# Altium PCB Pranus_LEDMatrix_B1_2015-06-04.PcbDoc
Units mil, origin at the board's own origin, x right, y up, seen from the top; angles counter-clockwise.
Board outline 3346.44 x 2837.73 mil, 2 copper layers (Top Layer, Bottom Layer); 192 components, 79 nets, 436 pads, 250 vias.
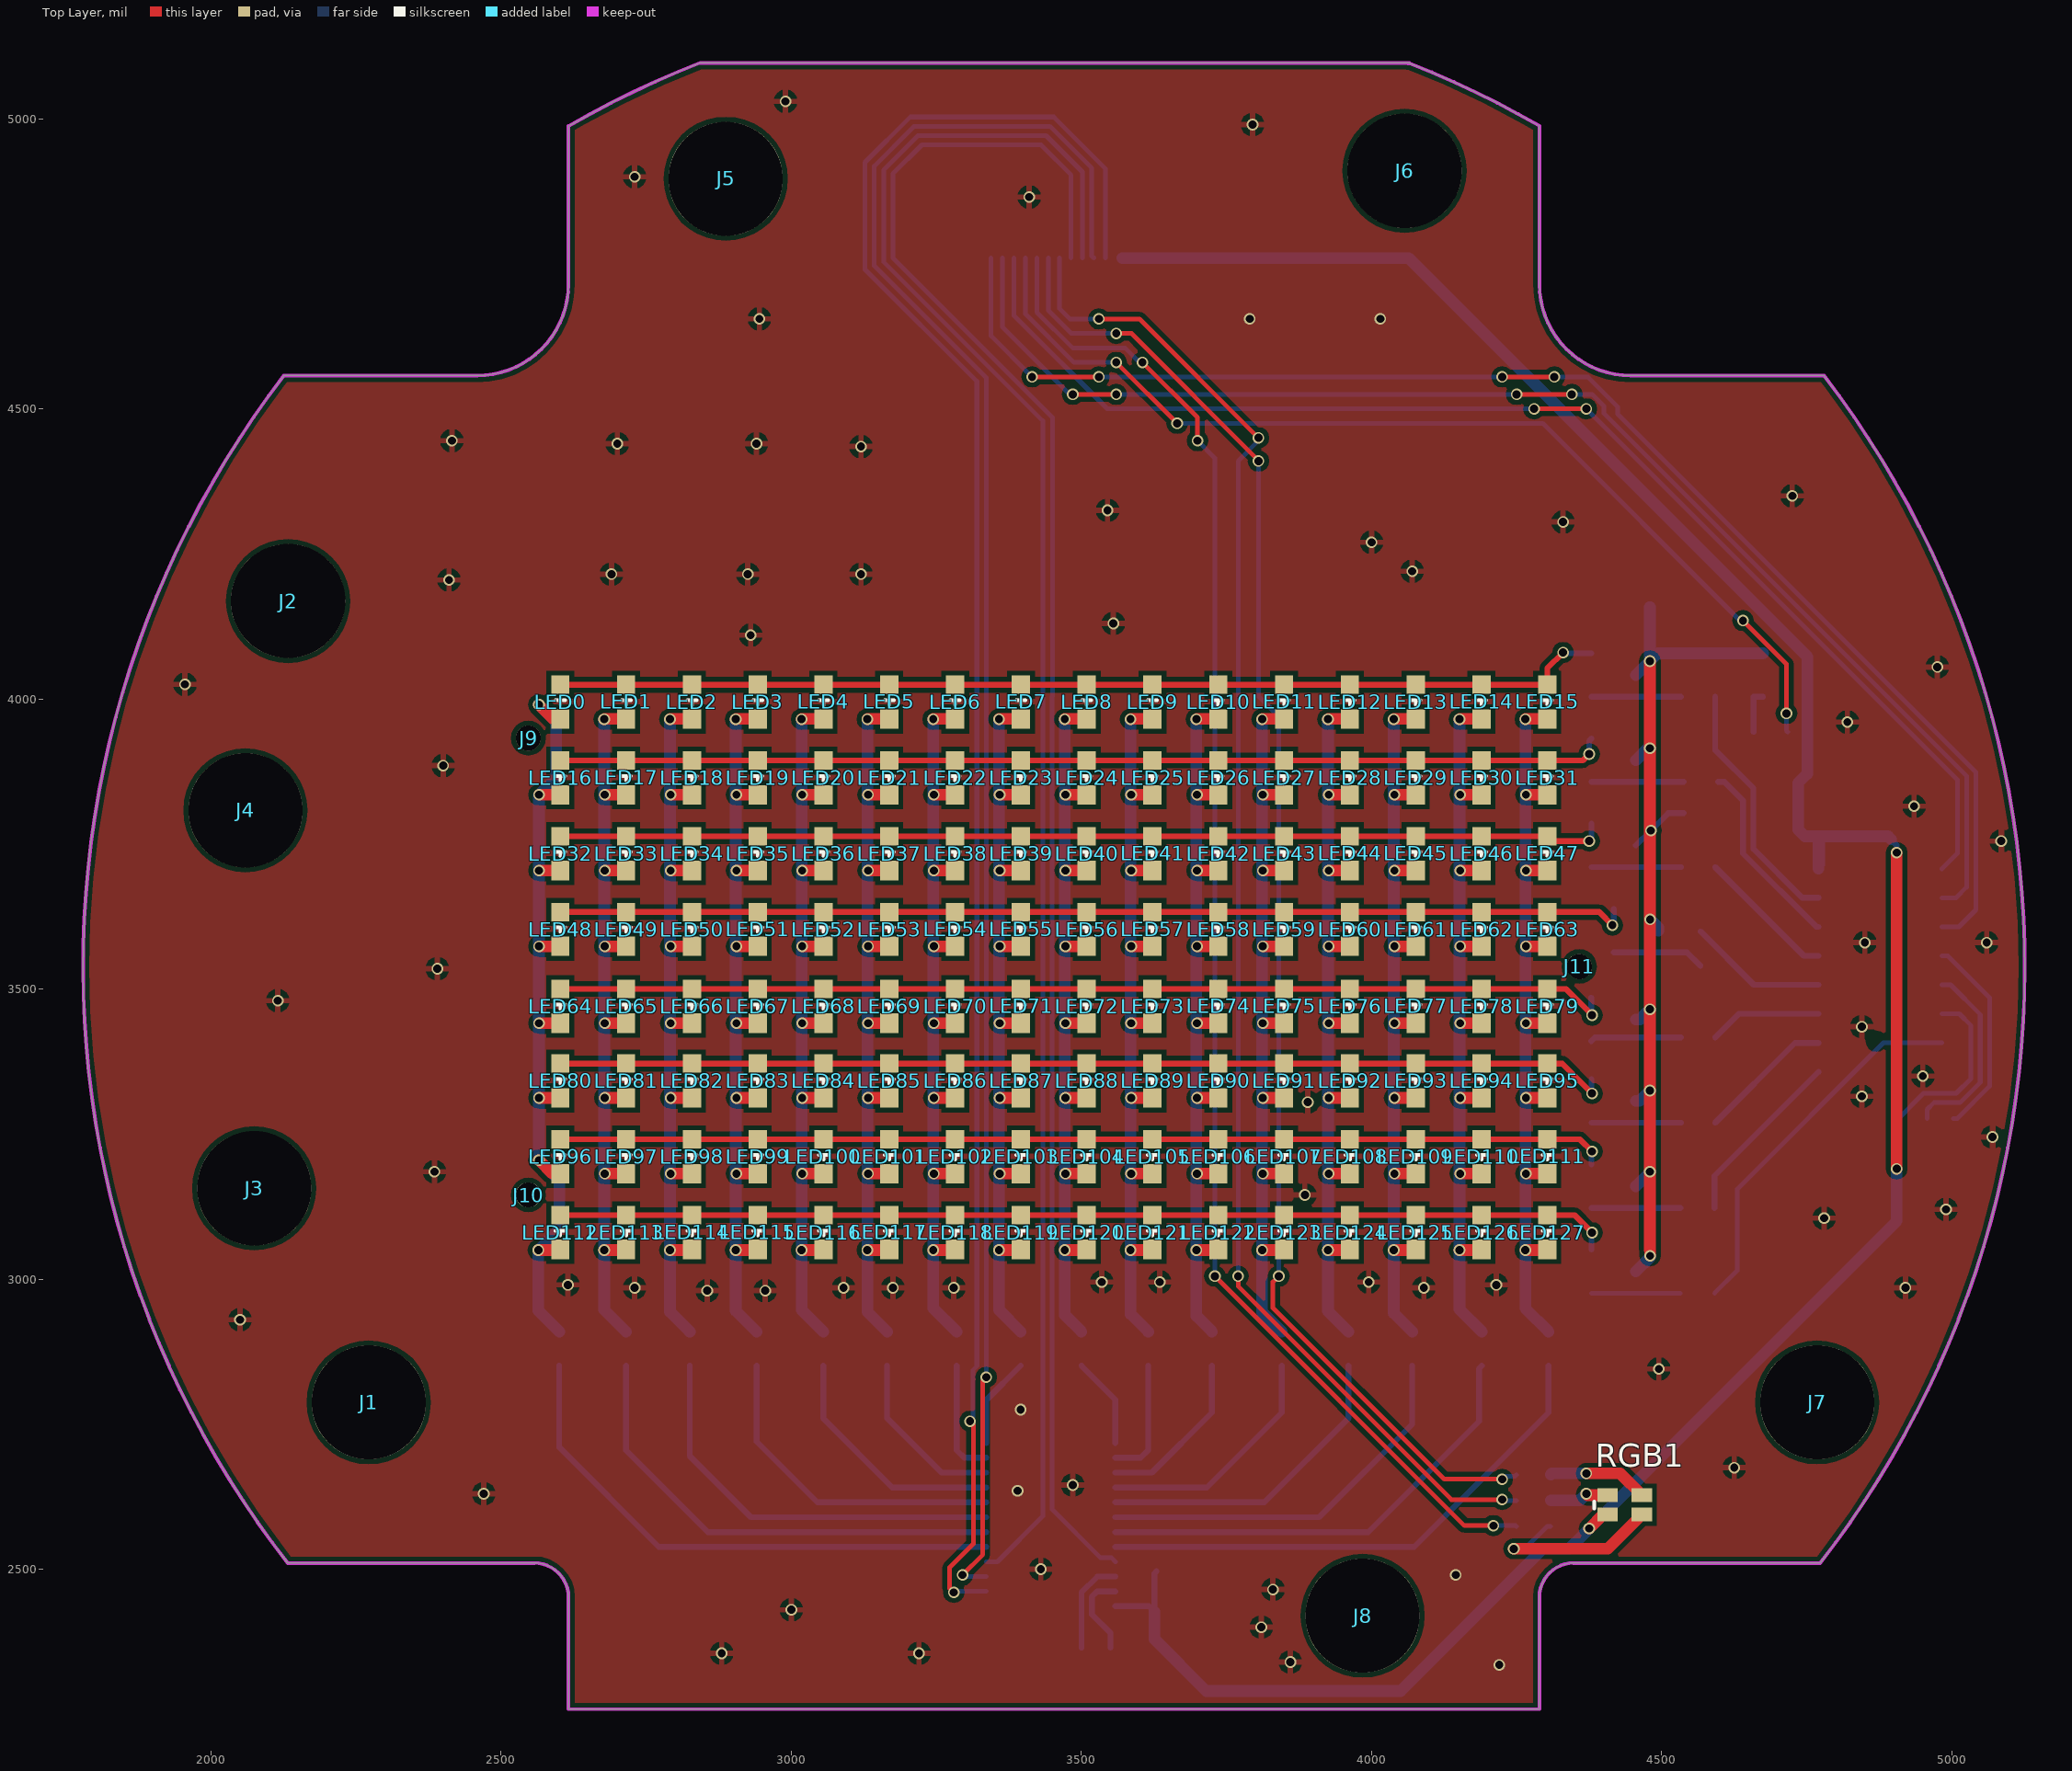
[diagram p0: Top Layer view]
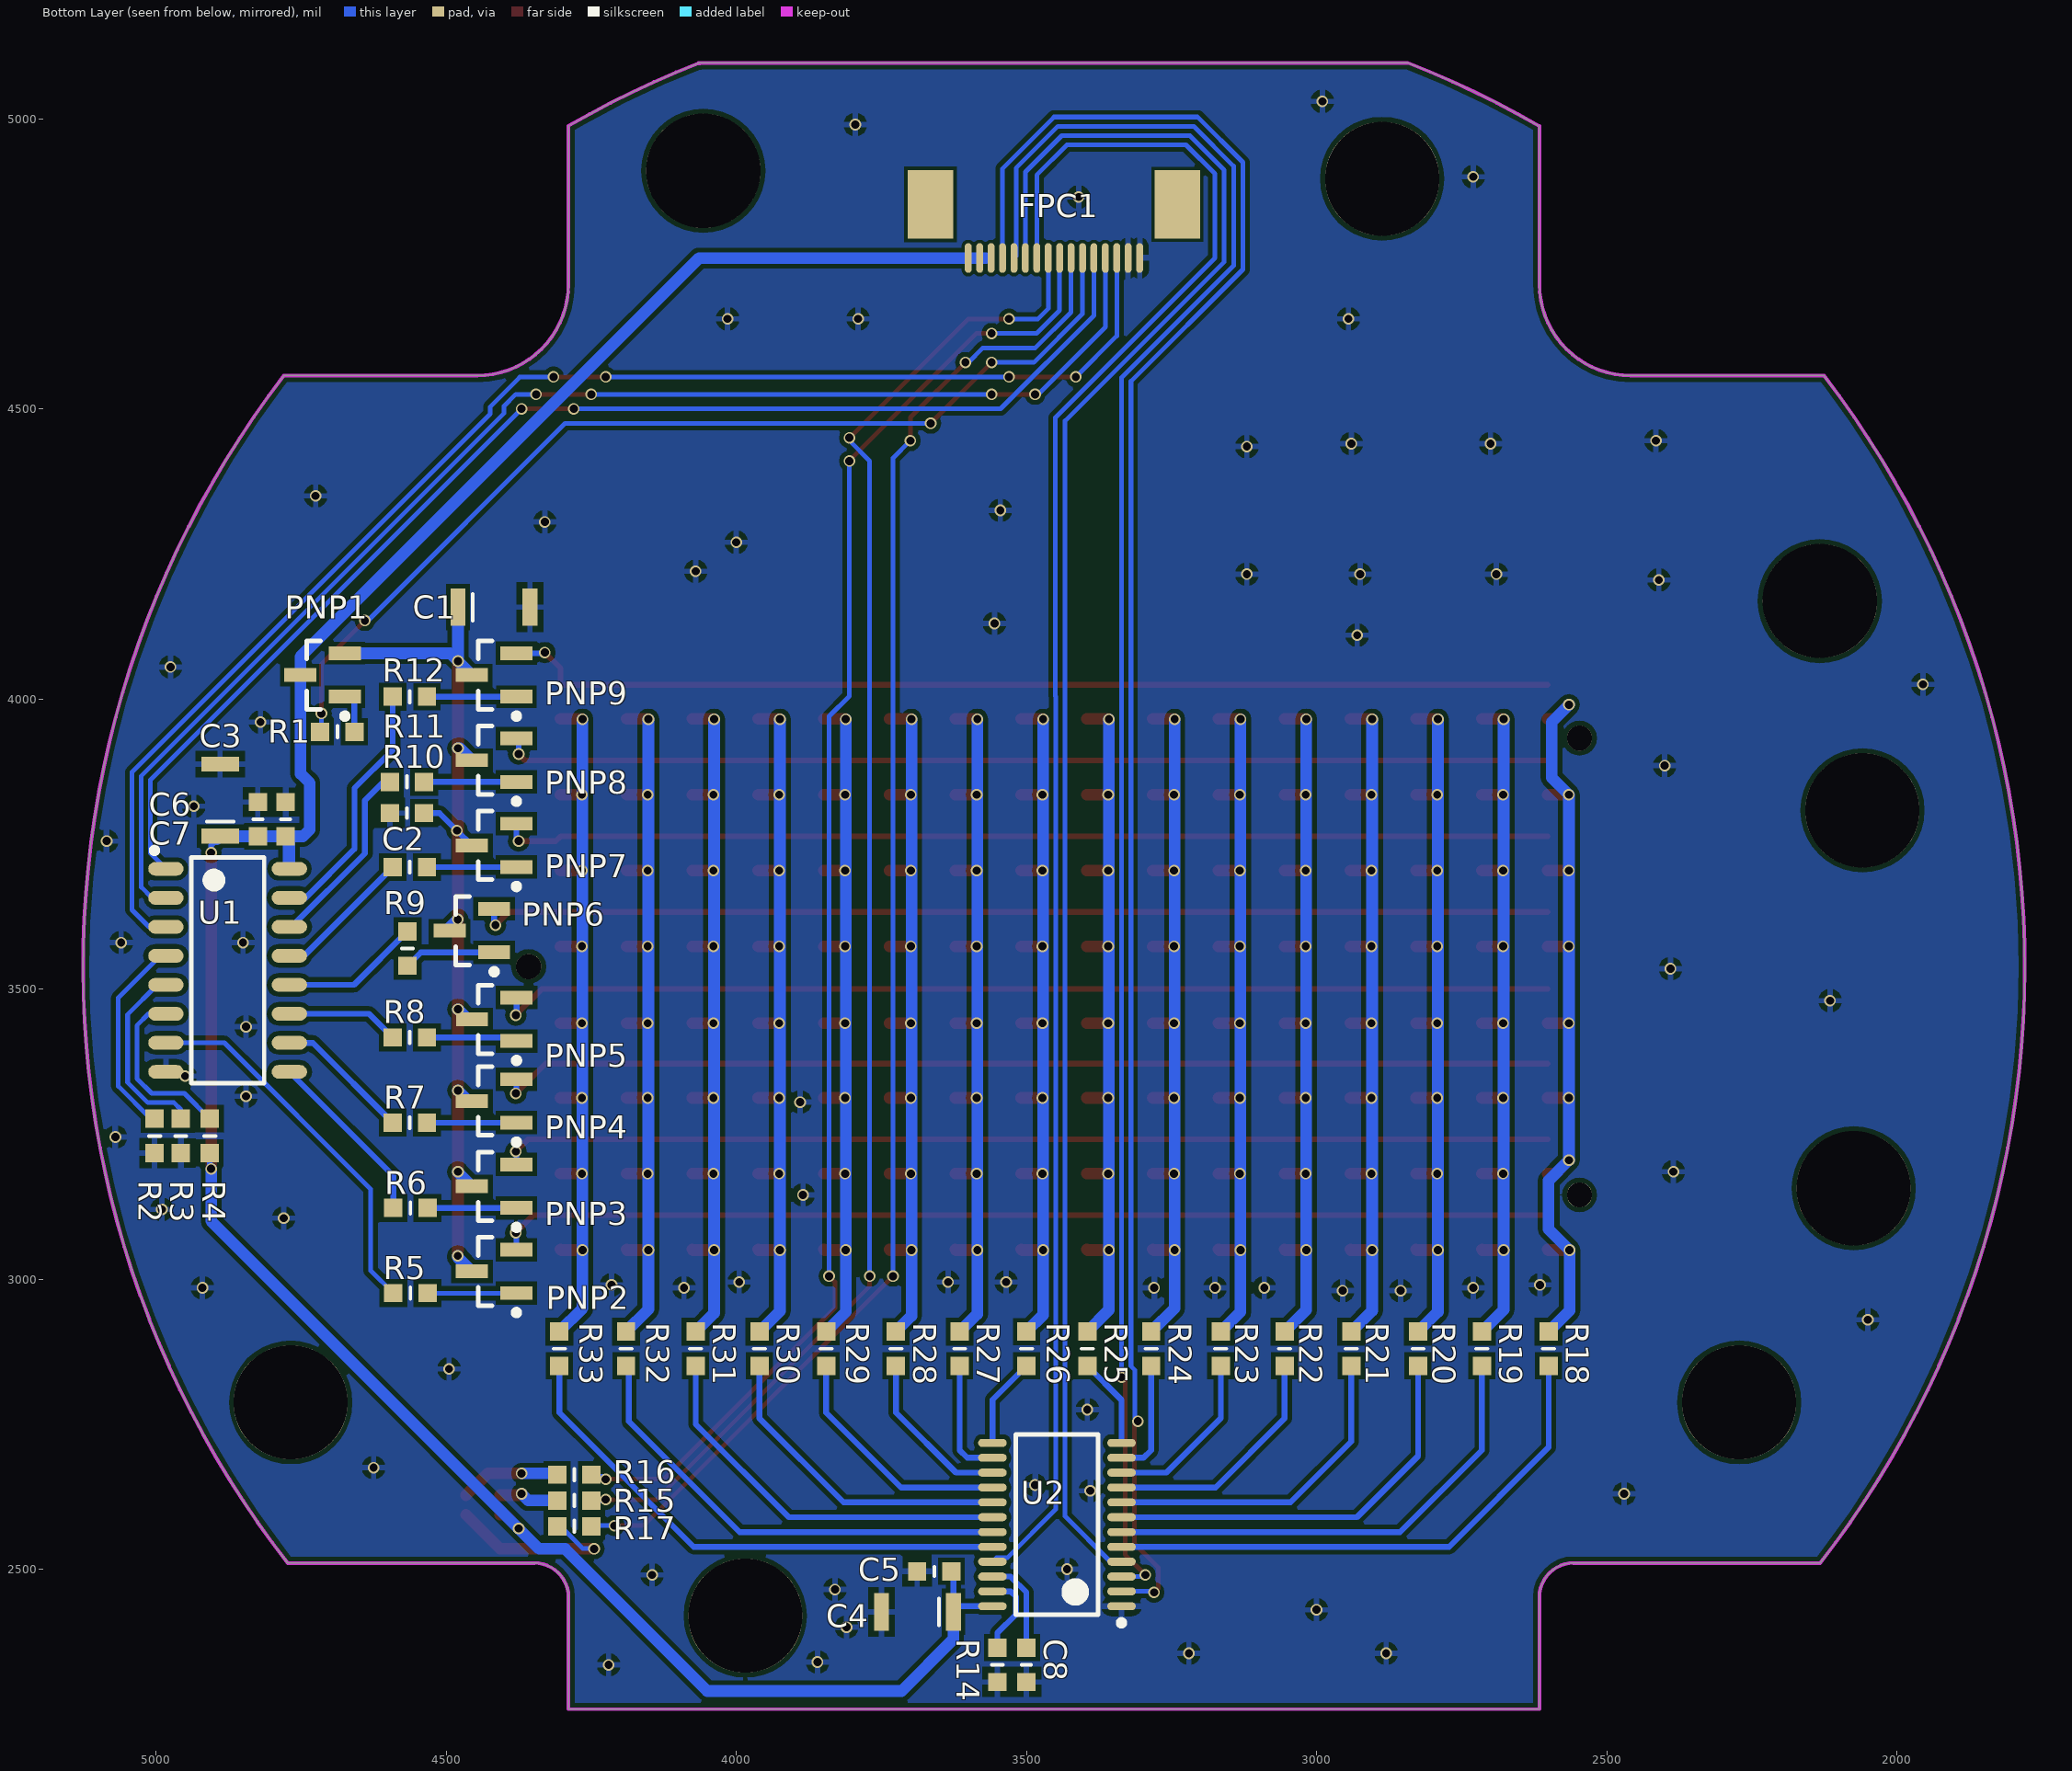
[diagram p1: Bottom Layer view, seen from below]

## Layer stack, top to bottom
Top Layer: signal copper 1.4
Dielectric: dielectric 12.6, FR-4, Dk 4.8
Bottom Layer: signal copper 1.4

## Board outline
2615.95,2258.7 2615.95,2451.61 ccw(c2556.9,2451.61) 2556.9,2510.67 2132.03,2510.67 cw(c3452.57,3538.23) 2125.51,4557.35 2458.47,4557.35 ccw(c2458.47,4714.83) 2615.95,4714.83 2615.95,4987.29 cw(c3452.57,3538.23) 2842.9,5096.43 2842.9,5096.24 4065.32,5096.24 4065.32,5095.64 cw(c3452.48,3538.68) 4289.36,4987.59 4289.18,4987.29 4289.18,4714.83 ccw(c4446.66,4714.83) 4446.66,4557.35 4779.63,4557.35 cw(c3452.57,3538.23) 4773.1,2510.67 4348.24,2510.67 ccw(c4348.24,2451.61) 4289.18,2451.61 4289.18,2258.7

## Design rules (kind name [scope] priority, off if disabled: settings)
Clearance "6mil Special" [(HasFootprint('FPC 0.5mm 4P') OR HasFootprint('FPC 0.5mm 16P'))] p1: gap=6
Clearance "8mil all" [All] p2: gap=8
ComponentClearance [All] p1: gap=0 collisioncheckmode=3 verticalgap=10 showdistances=FALSE
Height [All] p1: minheight=0 maxheight=2000 prefheight=500
HoleSize [All] p1: absolutevalues=TRUE maxlimit=1000 minlimit=1 maxpercent=80.000 minpercent=20.000
HoleToHoleClearance [All] p1: gap=8 allowstackedmicrovias=TRUE
MinimumSolderMaskSliver [All] p1: minsoldermaskwidth=0
PolygonConnect [All] p1: connectstyle=Relief reliefconductorwidth=10 reliefentries=4 polygonreliefangle="90 Angle" airgapwidth=10
RoutingCorners [All] p1: cornerstyle=45-Degree minsetback=10 maxsetback=100
RoutingVias [All] p1: holewidth=14 width=20 viastyle="Through Hole" minholewidth=14 minwidth=20 maxholewidth=100 maxwidth=200
SilkToSilkClearance [All] p1: silktosilkclearance=8
SilkToSolderMaskClearance [IsPad] p1: minsilkscreentomaskgap=0 clearancetoexposedcopper=TRUE
SolderMaskExpansion [All] p1: expansion=4
Width 20mil_Power [(InNet('EP_SUPPLY&VBAT') OR InNet('PSUPPLY') OR InNet('P_3.3V') OR InNet('PSUPPLYBAT') OR InNet('P_3.3V') OR InNet('P_5V'))] p1: maxlimit=1000 minlimit=8 preferedwidth=20
Width 8mil_Basic [All] p2: maxlimit=20 minlimit=8 preferedwidth=10
20 further rules are at their usual default settings.

## Components (designator, comment, footprint, x,y, rotation, side; value= is the part's Value field where it differs from the comment)
C1 "10uf" PolarC1206 4417.6,4158.21 r180 bottom
C2 "1uf" C0603 4567.6,3803.21 r0 bottom
C3 "10uf" PolarC1206 4889.57,3825.63 r90 bottom
C4 "10uf" PolarC1206 3687.72,2426.42 r0 bottom
C5 "1uf" C0603 3658.8,2496.21 r0 bottom
C6 "1uf" C0603 4824.6,3792.68 r90 bottom
C7 "1uf" C0603 4776.6,3792.68 r90 bottom
C8 "1uf" C0603 3500,2335 r270 bottom
FPC1 "FPC 0.5mm 16P" "FPC 0.5MM 16P" 3452.56,4806.22 r0 bottom
J1 "CON1" 5MM 2271.73,2787.5 r0 top locked
J2 "CON1" 5MM 2132.6,4168.68 r0 top locked
J3 "CON1" 5MM 2074.25,3156.4 r0 top locked
J4 "CON1" 5MM 2059.21,3807.98 r0 top locked
J5 "CON1" 5MM 2886.85,4896.56 r0 top locked
J6 "CON1" 5MM 4056.85,4910.34 r0 top locked
J7 "CON1" 5MM 4767.95,2787.5 r0 top locked
J8 "CON1" 5MM 3984.41,2419.79 r0 top locked
J9 "CON1" 1.1MM 2546.8,3932.42 r0 top
J10 "CON1" 1.1MM 2546.8,3145.02 r90 top
J11 "CON1" 1.1MM 4357.82,3538.72 r0 top
LED0 "White" LED0603 2601.85,3994.92 r270 top locked
LED1 "White" LED0603 2715.25,3994.92 r270 top locked
LED2 "White" LED0603 2828.64,3994.92 r270 top locked
LED3 "White" LED0603 2942.04,3994.92 r270 top locked
LED4 "White" LED0603 3055.44,3994.92 r270 top locked
LED5 "White" LED0603 3168.83,3994.92 r270 top locked
LED6 "White" LED0603 3282.23,3994.92 r270 top locked
LED7 "White" LED0603 3395.62,3994.92 r270 top locked
LED8 "White" LED0603 3509.02,3994.92 r270 top locked
LED9 "White" LED0603 3622.42,3994.92 r270 top locked
LED10 "White" LED0603 3735.81,3994.92 r270 top locked
LED11 "White" LED0603 3849.21,3994.92 r270 top locked
LED12 "White" LED0603 3962.61,3994.92 r270 top locked
LED13 "White" LED0603 4076,3994.92 r270 top locked
LED14 "White" LED0603 4189.4,3994.92 r270 top locked
LED15 "White" LED0603 4302.79,3994.92 r270 top locked
LED16 "White" LED0603 2601.85,3864.31 r270 top locked
LED17 "White" LED0603 2715.25,3864.31 r270 top locked
LED18 "White" LED0603 2828.64,3864.31 r270 top locked
LED19 "White" LED0603 2942.04,3864.31 r270 top locked
LED20 "White" LED0603 3055.44,3864.31 r270 top locked
LED21 "White" LED0603 3168.83,3864.31 r270 top locked
LED22 "White" LED0603 3282.23,3864.31 r270 top locked
LED23 "White" LED0603 3395.62,3864.31 r270 top locked
LED24 "White" LED0603 3509.02,3864.31 r270 top locked
LED25 "White" LED0603 3622.42,3864.31 r270 top locked
LED26 "White" LED0603 3735.81,3864.31 r270 top locked
LED27 "White" LED0603 3849.21,3864.31 r270 top locked
LED28 "White" LED0603 3962.61,3864.31 r270 top locked
LED29 "White" LED0603 4076,3864.31 r270 top locked
LED30 "White" LED0603 4189.4,3864.31 r270 top locked
LED31 "White" LED0603 4302.79,3864.31 r270 top locked
LED32 "White" LED0603 2601.85,3733.71 r270 top locked
LED33 "White" LED0603 2715.25,3733.71 r270 top locked
LED34 "White" LED0603 2828.64,3733.71 r270 top locked
LED35 "White" LED0603 2942.04,3733.71 r270 top locked
LED36 "White" LED0603 3055.44,3733.71 r270 top locked
LED37 "White" LED0603 3168.83,3733.71 r270 top locked
LED38 "White" LED0603 3282.23,3733.71 r270 top locked
LED39 "White" LED0603 3395.62,3733.71 r270 top locked
LED40 "White" LED0603 3509.02,3733.71 r270 top locked
LED41 "White" LED0603 3622.42,3733.71 r270 top locked
LED42 "White" LED0603 3735.81,3733.71 r270 top locked
LED43 "White" LED0603 3849.21,3733.71 r270 top locked
LED44 "White" LED0603 3962.61,3733.71 r270 top locked
LED45 "White" LED0603 4076,3733.71 r270 top locked
LED46 "White" LED0603 4189.4,3733.71 r270 top locked
LED47 "White" LED0603 4302.79,3733.71 r270 top locked
LED48 "White" LED0603 2601.85,3603.1 r270 top locked
LED49 "White" LED0603 2715.25,3603.1 r270 top locked
LED50 "White" LED0603 2828.64,3603.1 r270 top locked
LED51 "White" LED0603 2942.04,3603.1 r270 top locked
LED52 "White" LED0603 3055.44,3603.1 r270 top locked
LED53 "White" LED0603 3168.83,3603.1 r270 top locked
LED54 "White" LED0603 3282.23,3603.1 r270 top locked
LED55 "White" LED0603 3395.62,3603.1 r270 top locked
LED56 "White" LED0603 3509.02,3603.1 r270 top locked
LED57 "White" LED0603 3622.42,3603.1 r270 top locked
LED58 "White" LED0603 3735.81,3603.1 r270 top locked
LED59 "White" LED0603 3849.21,3603.1 r270 top locked
LED60 "White" LED0603 3962.61,3603.1 r270 top locked
LED61 "White" LED0603 4076,3603.1 r270 top locked
LED62 "White" LED0603 4189.4,3603.1 r270 top locked
LED63 "White" LED0603 4302.79,3603.1 r270 top locked
LED64 "White" LED0603 2601.85,3470.51 r270 top locked
LED65 "White" LED0603 2715.25,3470.51 r270 top locked
LED66 "White" LED0603 2828.64,3470.51 r270 top locked
LED67 "White" LED0603 2942.04,3470.51 r270 top locked
LED68 "White" LED0603 3055.44,3470.51 r270 top locked
LED69 "White" LED0603 3168.83,3470.51 r270 top locked
LED70 "White" LED0603 3282.23,3470.51 r270 top locked
LED71 "White" LED0603 3395.62,3470.51 r270 top locked
LED72 "White" LED0603 3509.02,3470.51 r270 top locked
LED73 "White" LED0603 3622.42,3470.51 r270 top locked
LED74 "White" LED0603 3735.81,3470.51 r270 top locked
LED75 "White" LED0603 3849.21,3470.51 r270 top locked
LED76 "White" LED0603 3962.61,3470.51 r270 top locked
LED77 "White" LED0603 4076,3470.51 r270 top locked
LED78 "White" LED0603 4189.4,3470.51 r270 top locked
LED79 "White" LED0603 4302.79,3470.51 r270 top locked
LED80 "White" LED0603 2601.85,3341.88 r270 top locked
LED81 "White" LED0603 2715.25,3341.88 r270 top locked
LED82 "White" LED0603 2828.64,3341.88 r270 top locked
LED83 "White" LED0603 2942.04,3341.88 r270 top locked
LED84 "White" LED0603 3055.44,3341.88 r270 top locked
LED85 "White" LED0603 3168.83,3341.88 r270 top locked
LED86 "White" LED0603 3282.23,3341.88 r270 top locked
LED87 "White" LED0603 3395.62,3341.88 r270 top locked
LED88 "White" LED0603 3509.02,3341.88 r270 top locked
LED89 "White" LED0603 3622.42,3341.88 r270 top locked
LED90 "White" LED0603 3735.81,3341.88 r270 top locked
LED91 "White" LED0603 3849.21,3341.88 r270 top locked
LED92 "White" LED0603 3962.61,3341.88 r270 top locked
LED93 "White" LED0603 4076,3341.88 r270 top locked
LED94 "White" LED0603 4189.4,3341.88 r270 top locked
LED95 "White" LED0603 4302.79,3341.88 r270 top locked
LED96 "White" LED0603 2601.85,3211.28 r270 top locked
LED97 "White" LED0603 2715.25,3211.28 r270 top locked
LED98 "White" LED0603 2828.64,3211.28 r270 top locked
LED99 "White" LED0603 2942.04,3211.28 r270 top locked
LED100 "White" LED0603 3055.44,3211.28 r270 top locked
LED101 "White" LED0603 3168.83,3211.28 r270 top locked
LED102 "White" LED0603 3282.23,3211.28 r270 top locked
LED103 "White" LED0603 3395.62,3211.28 r270 top locked
LED104 "White" LED0603 3509.02,3211.28 r270 top locked
LED105 "White" LED0603 3622.42,3211.28 r270 top locked
LED106 "White" LED0603 3735.81,3211.28 r270 top locked
LED107 "White" LED0603 3849.21,3211.28 r270 top locked
LED108 "White" LED0603 3962.61,3211.28 r270 top locked
LED109 "White" LED0603 4076,3211.28 r270 top locked
LED110 "White" LED0603 4189.4,3211.28 r270 top locked
LED111 "White" LED0603 4302.79,3211.28 r270 top locked
LED112 "White" LED0603 2601.85,3080.67 r270 top locked
LED113 "White" LED0603 2715.25,3080.67 r270 top locked
LED114 "White" LED0603 2828.64,3080.67 r270 top locked
LED115 "White" LED0603 2942.04,3080.67 r270 top locked
LED116 "White" LED0603 3055.44,3080.67 r270 top locked
LED117 "White" LED0603 3168.83,3080.67 r270 top locked
LED118 "White" LED0603 3282.23,3080.67 r270 top locked
LED119 "White" LED0603 3395.62,3080.67 r270 top locked
LED120 "White" LED0603 3509.02,3080.67 r270 top locked
LED121 "White" LED0603 3622.42,3080.67 r270 top locked
LED122 "White" LED0603 3735.81,3080.67 r270 top locked
LED123 "White" LED0603 3849.21,3080.67 r270 top locked
LED124 "White" LED0603 3962.61,3080.67 r270 top locked
LED125 "White" LED0603 4076,3080.67 r270 top locked
LED126 "White" LED0603 4189.4,3080.67 r270 top locked
LED127 "White" LED0603 4302.79,3080.67 r270 top locked
PNP1 "8550" SOT23-3 4712.91,4041.21 r0 bottom
PNP2 "8550" SOT23-3 4417.28,3013.21 r0 bottom
PNP3 "8550" SOT23-3 4417.28,3160.07 r0 bottom
PNP4 "8550" SOT23-3 4417.28,3306.93 r0 bottom
PNP5 "8550" SOT23-3 4417.13,3447.68 r0 bottom
PNP6 "8550" SOT23-3 4455.67,3600.64 r0 bottom
PNP7 "8550" SOT23-3 4417.28,3747.5 r0 bottom
PNP8 "8550" SOT23-3 4417.28,3894.35 r0 bottom
PNP9 "8550" SOT23-3 4417.28,4041.21 r0 bottom
R1 "510" R0603 4687.6,3943.21 r180 bottom
R2 "10K" R0603 5002.4,3246.79 r90 bottom
R3 "10K" R0603 4957.4,3246.79 r90 bottom
R4 "10K" R0603 4907.4,3246.79 r90 bottom
R5 "510" R0603 4561.6,2975.81 r180 bottom
R6 "510" R0603 4561.6,3122.67 r180 bottom
R7 "510" R0603 4562.6,3269.52 r180 bottom
R8 "510" R0603 4562.6,3416.38 r180 bottom
R9 "510" R0603 4566.73,3569.72 r270 bottom
R10 "510" R0603 4562.6,3710.1 r180 bottom
R11 "510" R0603 4567.6,3856.95 r180 bottom
R12 "510" R0603 4562.6,4003.81 r180 bottom
R14 "4.7K" R0603 3550,2335 r270 bottom
R15 "1K" R0603 4279.1,2618.3 r0 bottom
R16 "1K" R0603 4279.1,2662.8 r180 bottom
R17 "1K" R0603 4279.1,2573.8 r180 bottom
R18 "1K" R0603 2600,2880 r90 bottom
R19 "1K" R0603 2715,2880 r90 bottom
R20 "1K" R0603 2825,2880 r90 bottom
R21 "1K" R0603 2940,2880 r90 bottom
R22 "1K" R0603 3055,2880 r90 bottom
R23 "1K" R0603 3165,2880 r90 bottom
R24 "1K" R0603 3285,2880 r90 bottom
R25 "1K" R0603 3395,2880 r90 bottom
R26 "1K" R0603 3500,2880 r90 bottom
R27 "1K" R0603 3615,2880 r90 bottom
R28 "1K" R0603 3725,2880 r90 bottom
R29 "1K" R0603 3845,2880 r90 bottom
R30 "1K" R0603 3960,2880 r90 bottom
R31 "1K" R0603 4070,2880 r90 bottom
R32 "1K" R0603 4190,2880 r90 bottom
R33 "1K" R0603 4305,2880 r90 bottom
RGB1 "0805" "RGB 0805" 4436.32,2610.86 r0 top locked
U1 "74HC138D" SOIC16_39MM 4876.6,3532.21 r180 bottom
U2 "MBI5025GP" TSOP65P640X120-24L 3447.32,2576.8 r0 bottom locked

## Footprints (in the part's own frame and the unit in brackets; to place one, negate y for a bottom-side part, rotate by r counter-clockwise, add the part's x,y. Pads: shape width x height; smd on the part's side, far side on the other; paste and mask are expansions set on the pad)
1.1MM [mm]
  round 1.1 hole 1.1: 1(0,0)
5MM [mm]
  round 5 hole 5: 1(0,0)
C0603 [mm]
  rect 0.8x0.8 smd: 1(-0.75,0) 2(0.75,0)
  silkscreen extent 0,-0.2 0,0.2, body extent -0.8,-0.4 0.8,0.4, height 0.8
"FPC 0.5MM 16P" [mm]
  oval 0.3x1.3 smd: 1(-3.75,1.175) 2(-3.25,1.175) 3(-2.75,1.175) 4(-2.25,1.175) 5(-1.75,1.175) 6(-1.25,1.175) 7(-0.75,1.175) 8(-0.25,1.175) 9(0.25,1.175) 10(0.75,1.175) 11(1.25,1.175) 12(1.75,1.175) 13(2.25,1.175) 14(2.75,1.175) 15(3.25,1.175) 16(3.75,1.175)
  rect 2x3 smd: ""(-5.4,-1.175) ""(5.4,-1.175)
  body extent -6.79,-3.89 6.75,1.68, height 2
LED0603 [mm]
  rect 0.8x0.8 smd: A(-0.75,0)
  rect 0.85x0.8 smd: C(0.75,0)
  silkscreen extent -0.07,-0.2 0.13,0.2, body extent -0.8,-0.4 0.8,0.4, height 0.8
PolarC1206 [mm]
  rect 0.65x1.65 smd: A(-1.575,0) C(1.575,0)
  silkscreen extent -0.94,-0.58 -0.94,0.58, body extent -1.6,-0.8 1.6,0.8, height 0.6
R0603 [mm]
  rect 0.8x0.8 smd: 1(-0.75,0) 2(0.75,0)
  silkscreen extent 0,-0.25 0,0.25, body extent -0.8,-0.4 0.8,0.4, height 0.5
"RGB 0805" [mm]
  rect 0.9x0.6 smd: 1(-0.75,0.425) 2(0.75,0.425) 3(-0.75,-0.425) 4(0.75,-0.425)
  silkscreen extent -1.34,-0.16 -1.34,0.14, body extent -0.82,-0.8 0.77,0.8, height 0.38
SOIC16_39MM [mm]
  oval 1.55x0.6 smd: 1(-2.7,4.445) 2(-2.7,3.175) 3(-2.7,1.905) 4(-2.7,0.635) 5(-2.7,-0.635) 6(-2.7,-1.905) 7(-2.7,-3.175) 8(-2.7,-4.445) 9(2.7,-4.445) 10(2.7,-3.175) 11(2.7,-1.905) 12(2.7,-0.635) 13(2.7,0.635) 14(2.7,1.905) 15(2.7,3.175) 16(2.7,4.445)
  silkscreen extent -3.33,-4.95 1.6,5.37, body extent -1.65,-4.95 1.65,4.95, height 1.2
SOT23-3 [mm]
  rect 1.4x0.6 smd: 1(-0.975,0.95) 2(-0.975,-0.95) 3(0.975,0)
  silkscreen extent -1.1,-1.5 0.7,1.92, body extent -0.7,-1.5 0.7,1.5, height 1
TSOP65P640X120-24L [mm] "TSOP, 24-Leads, Body 7.80x4.40mm, Pitch 0.65mm, IPC High Density"
  oval 1.25x0.35 smd: 1(-2.825,3.575) 2(-2.825,2.925) 3(-2.825,2.275) 4(-2.825,1.625) 5(-2.825,0.975) 6(-2.825,0.325) 7(-2.825,-0.325) 8(-2.825,-0.975) 9(-2.825,-1.625) 10(-2.825,-2.275) 11(-2.825,-2.925) 12(-2.825,-3.575) 13(2.825,-3.575) 14(2.825,-2.925) 15(2.825,-2.275) 16(2.825,-1.625) 17(2.825,-0.975) 18(2.825,-0.325) 19(2.825,0.325) 20(2.825,0.975) 21(2.825,1.625) 22(2.825,2.275) 23(2.825,2.925) 24(2.825,3.575)
  silkscreen extent -2.95,-3.95 1.8,4.42, body extent -2.25,-3.95 2.25,3.95, height 1.2

## Part data
C1 C3 C4: library part PolarCap
C2 C5 C6 C7 C8: library part C
FPC1: library part "FPC 16P"
LED0 LED1 LED2 LED3 LED4 LED5 LED6 LED7 LED8 LED9 LED10 LED11 LED12 LED13 LED14 LED15 LED16 LED17 LED18 LED19 LED20 LED21 LED22 LED23 LED24 LED25 LED26 LED27 LED28 LED29 LED30 LED31 LED32 LED33 LED34 LED35 LED36 LED37 LED38 LED39 LED40 LED41 LED42 LED43 LED44 LED45 LED46 LED47 LED48 LED49 LED50 LED51 LED52 LED53 LED54 LED55 LED56 LED57 LED58 LED59 LED60 LED61 LED62 LED63 LED64 LED65 LED66 LED67 LED68 LED69 LED70 LED71 LED72 LED73 LED74 LED75 LED76 LED77 LED78 LED79 LED80 LED81 LED82 LED83 LED84 LED85 LED86 LED87 LED88 LED89 LED90 LED91 LED92 LED93 LED94 LED95 LED96 LED97 LED98 LED99 LED100 LED101 LED102 LED103 LED104 LED105 LED106 LED107 LED108 LED109 LED110 LED111 LED112 LED113 LED114 LED115 LED116 LED117 LED118 LED119 LED120 LED121 LED122 LED123 LED124 LED125 LED126 LED127: library part LED
PNP1 PNP2 PNP3 PNP4 PNP5 PNP6 PNP7 PNP8 PNP9: library part PNP
R1 R2 R3 R4 R5 R6 R7 R8 R9 R10 R11 R12 R14 R15 R16 R17 R18 R19 R20 R21 R22 R23 R24 R25 R26 R27 R28 R29 R30 R31 R32 R33: library part R
RGB1: library part "RGB 0805"
U1: library part 74HC138

## Via types
v1: diameter 20, hole 14, Top Layer to Bottom Layer, 250 vias

## Nets (pads, with @x,y where several pads share a name; then routed paths per layer and width w, separated by ;. In a path a pad name is that pad's centre, name@x,y a point inside that pad or via, vN(x,y) a via of type N, cw(c..) or ccw(c..) an arc to the next point about the centre after c; other vN are vias at no path point)
GND: C1.C C2.2 C3.C C4.C C5.2 C6.2 C7.2 C8.2 FPC1.1 FPC1.2 R2.1 R3.1 R14.2 U1.8 U2.1
  other v1: 4220,2335 3860,2340 2880,2355 3220,2355 3810,2400 3000,2430 3830,2465 4145,2490 3430,2500 2470,2630 3390,2635 3485,2645 4625,2675 3395,2775 4495,2845 2050,2930 2855,2980 2955,2980 2730,2985 3090,2985 3175,2985 3280,2985 4090,2985 4920,2985 2615,2990 4215,2990 3535,2995 3635,2995 3995,2995 4780,3105 4990,3120 3885,3145 2385,3185 5070,3245 3890,3305 4845,3315 4950,3350 4845,3435 2115,3480 2390,3535 4850,3580 5060,3580 5085,3755 4935,3815 2400,3885 4820,3960 1955,4025 4975,4055 2930,4110 3555,4130 2410,4205 2690,4215 2925,4215 3120,4215 4070,4220 4000,4270 4330,4305 3545,4325 4725,4350 3120,4435 2700,4440 2940,4440 2415,4445 2945,4655 3790,4655 4015,4655 3410,4865 2730,4900 3795,4990 2990,5030
NetC1_A: C1.A C2.1 PNP1.2 PNP2.3 PNP3.3 PNP4.3 PNP5.3 PNP6.3 PNP7.3 PNP8.3 PNP9.3 | length 1650.3
  Top Layer w20: v1(4479.61,4065.15) v1(4479.61,3915) v1(4479.61,3465) v1(4479.61,3325) v1(4479.61,3185) 4479.61,3050.39 4480,3050 v1(4480,3040)
  Bottom Layer w10: PNP7.3 v1(4481.39,3773.22) 4511.38,3803.21 C2.1
  Bottom Layer w20: PNP5.3 4462.28,3447.68 v1(4479.61,3465) ; PNP2.3 4480,3037.54 v1(4480,3040) ; PNP3.3 4479.61,3184.01 v1(4479.61,3185) ; PNP4.3 4461.53,3306.93 v1(4479.61,3325) ; PNP8.3 4476.31,3915 v1(4479.61,3915) ; PNP9.3 v1(4479.61,4065.15) ; C1.A v1(4479.61,4065.15) ; v1(4480,3620) 4494.06,3605.94 PNP6.3 ; PNP1.2 4493.07,4078.61 v1(4479.61,4065.15)
NetC8_1: C8.1 U2.22 | length 165.3
  Bottom Layer w10: C8.1 3500,2460 3527.23,2487.23 U2.22
NetLED0_A: LED0.A LED1.A LED2.A LED3.A LED4.A LED5.A LED6.A LED7.A LED8.A LED9.A LED10.A LED11.A LED12.A LED13.A LED14.A LED15.A PNP9.2 | length 1817.2
  Top Layer w10: LED0.A LED1.A LED2.A LED3.A LED4.A LED5.A LED6.A LED7.A LED8.A LED9.A LED10.A LED11.A LED12.A LED13.A LED14.A LED15.A 4302.79,4052.79 v1(4330,4080)
  Bottom Layer w10: v1(4330,4080) 4331.39,4078.61 PNP9.2
NetLED0_C: LED0.C LED16.C LED32.C LED48.C LED64.C LED80.C LED96.C LED112.C R18.2 | length 1464.7
  Top Layer w20: v1(2564.06,3050) 2600.71,3050 LED112.C ; v1(2565,3205) 2588.25,3181.75 LED96.C ; v1(2565,3990) 2589.61,3965.39 LED0.C ; v1(2565.2,3312.36) LED80.C ; v1(2565.2,3440.98) LED64.C ; v1(2565.2,3573.57) LED48.C ; v1(2565.2,3704.18) LED32.C ; v1(2565.2,3834.79) LED16.C
  Bottom Layer w20: v1(2565,3990) 2595,3960 2595,3864.59 v1(2565.2,3834.79) 2565,3834.59 v1(2565,3205) 2600,3170 2600,3085.94 v1(2564.06,3050) 2564.06,2945.47 R18.2
NetLED1_C: LED1.C LED17.C LED33.C LED49.C LED65.C LED81.C LED97.C LED113.C R19.2 | length 1367.2
  Top Layer w20: v1(2677.45,3050) 2714.11,3050 LED113.C ; v1(2677.45,3965) 2677.85,3965.39 LED1.C ; v1(2678.59,3181.75) LED97.C ; v1(2678.59,3312.36) LED81.C ; v1(2678.59,3440.98) LED65.C ; v1(2678.59,3573.57) LED49.C ; v1(2678.59,3704.18) LED33.C ; v1(2678.59,3834.79) LED17.C
  Bottom Layer w20: v1(2677.45,3965) v1(2677.45,3050) 2677.45,2947.07 R19.2
NetLED2_C: LED2.C LED18.C LED34.C LED50.C LED66.C LED82.C LED98.C LED114.C R20.2 | length 1365.8
  Top Layer w20: v1(2790.85,3050) 2827.5,3050 LED114.C ; v1(2790.85,3965) 2791.24,3965.39 LED2.C ; v1(2791.99,3181.75) LED98.C ; v1(2791.99,3312.36) LED82.C ; v1(2791.99,3440.98) LED66.C ; v1(2791.99,3573.57) LED50.C ; v1(2791.99,3704.18) LED34.C ; v1(2791.99,3834.79) LED18.C
  Bottom Layer w20: v1(2790.85,3965) v1(2790.85,3050) 2790.85,2943.68 R20.2
NetLED3_C: LED3.C LED19.C LED35.C LED51.C LED67.C LED83.C LED99.C LED115.C R21.2 | length 1366.4
  Top Layer w20: v1(2904.25,3050) 2940.9,3050 LED115.C ; v1(2904.25,3965) 2904.64,3965.39 LED3.C ; v1(2905.39,3181.75) LED99.C ; v1(2905.39,3312.36) LED83.C ; v1(2905.39,3440.98) LED67.C ; v1(2905.39,3573.57) LED51.C ; v1(2905.39,3704.18) LED35.C ; v1(2905.39,3834.79) LED19.C
  Bottom Layer w20: v1(2904.25,3965) v1(2904.25,3050) 2904.25,2945.28 R21.2
NetLED4_C: LED4.C LED20.C LED36.C LED52.C LED68.C LED84.C LED100.C LED116.C R22.2 | length 1367.1
  Top Layer w20: v1(3017.64,3050) 3054.29,3050 LED116.C ; v1(3017.64,3965) 3018.04,3965.39 LED4.C ; v1(3018.78,3181.75) LED100.C ; v1(3018.78,3312.36) LED84.C ; v1(3018.78,3440.98) LED68.C ; v1(3018.78,3573.57) LED52.C ; v1(3018.78,3704.18) LED36.C ; v1(3018.78,3834.79) LED20.C
  Bottom Layer w20: v1(3017.64,3965) v1(3017.64,3050) 3017.64,2946.89 R22.2
NetLED5_C: LED5.C LED21.C LED37.C LED53.C LED69.C LED85.C LED101.C LED117.C R23.2 | length 1365.7
  Top Layer w20: v1(3131.04,3050) 3167.69,3050 LED117.C ; v1(3131.04,3965) 3131.43,3965.39 LED5.C ; v1(3132.18,3181.75) LED101.C ; v1(3132.18,3312.36) LED85.C ; v1(3132.18,3440.98) LED69.C ; v1(3132.18,3573.57) LED53.C ; v1(3132.18,3704.18) LED37.C ; v1(3132.18,3834.79) LED21.C
  Bottom Layer w20: v1(3131.04,3965) v1(3131.04,3050) 3131.04,2943.49 R23.2
NetLED6_C: LED6.C LED22.C LED38.C LED54.C LED70.C LED86.C LED102.C LED118.C R24.2 | length 1368.4
  Top Layer w20: v1(3244.43,3050) 3281.09,3050 LED118.C ; v1(3244.43,3965) 3244.83,3965.39 LED6.C ; v1(3245.58,3181.75) LED102.C ; v1(3245.58,3312.36) LED86.C ; v1(3245.58,3440.98) LED70.C ; v1(3245.58,3573.57) LED54.C ; v1(3245.58,3704.18) LED38.C ; v1(3245.58,3834.79) LED22.C
  Bottom Layer w20: v1(3244.43,3965) v1(3244.43,3050) 3244.43,2950.09 R24.2
NetLED7_C: LED7.C LED23.C LED39.C LED55.C LED71.C LED87.C LED103.C LED119.C R25.2 | length 1367
  Top Layer w20: v1(3357.83,3050) 3394.48,3050 LED119.C ; v1(3357.83,3965) 3358.22,3965.39 LED7.C ; v1(3358.97,3181.75) LED103.C ; v1(3358.97,3312.36) LED87.C ; v1(3358.97,3440.98) LED71.C ; v1(3358.97,3573.57) LED55.C ; v1(3358.97,3704.18) LED39.C ; v1(3358.97,3834.79) LED23.C
  Bottom Layer w20: v1(3357.83,3965) v1(3357.83,3050) 3357.83,2946.7 R25.2
NetLED8_C: LED8.C LED24.C LED40.C LED56.C LED72.C LED88.C LED104.C LED120.C R26.2 | length 1363.5
  Top Layer w20: v1(3471.23,3050) 3507.88,3050 LED120.C ; v1(3471.23,3965) 3471.62,3965.39 LED8.C ; v1(3472.37,3181.75) LED104.C ; v1(3472.37,3312.36) LED88.C ; v1(3472.37,3440.98) LED72.C ; v1(3472.37,3573.57) LED56.C ; v1(3472.37,3704.18) LED40.C ; v1(3472.37,3834.79) LED24.C
  Bottom Layer w20: v1(3471.23,3965) v1(3471.23,3050) 3471.23,2938.3 R26.2
NetLED9_C: LED9.C LED25.C LED41.C LED57.C LED73.C LED89.C LED105.C LED121.C R27.2 | length 1364.2
  Top Layer w20: v1(3584.62,3050) 3621.28,3050 LED121.C ; v1(3584.62,3965) 3585.02,3965.39 LED9.C ; v1(3585.76,3181.75) LED105.C ; v1(3585.76,3312.36) LED89.C ; v1(3585.76,3440.98) LED73.C ; v1(3585.76,3573.57) LED57.C ; v1(3585.76,3704.18) LED41.C ; v1(3585.76,3834.79) LED25.C
  Bottom Layer w20: v1(3584.62,3965) v1(3584.62,3050) 3584.62,2939.9 R27.2
NetLED10_C: LED10.C LED26.C LED42.C LED58.C LED74.C LED90.C LED106.C LED122.C R28.2 | length 1362.8
  Top Layer w20: v1(3698.02,3050) 3734.67,3050 LED122.C ; v1(3698.02,3965) 3698.41,3965.39 LED10.C ; v1(3699.16,3181.75) LED106.C ; v1(3699.16,3312.36) LED90.C ; v1(3699.16,3440.98) LED74.C ; v1(3699.16,3573.57) LED58.C ; v1(3699.16,3704.18) LED42.C ; v1(3699.16,3834.79) LED26.C
  Bottom Layer w20: v1(3698.02,3965) v1(3698.02,3050) 3698.02,2936.51 R28.2
NetLED11_C: LED11.C LED27.C LED43.C LED59.C LED75.C LED91.C LED107.C LED123.C R29.2 | length 1365.5
  Top Layer w20: v1(3811.42,3050) 3848.07,3050 LED123.C ; v1(3811.42,3965) 3811.81,3965.39 LED11.C ; v1(3812.56,3181.75) LED107.C ; v1(3812.56,3312.36) LED91.C ; v1(3812.56,3440.98) LED75.C ; v1(3812.56,3573.57) LED59.C ; v1(3812.56,3704.18) LED43.C ; v1(3812.56,3834.79) LED27.C
  Bottom Layer w20: v1(3811.42,3965) v1(3811.42,3050) 3811.42,2943.11 R29.2
NetLED12_C: LED12.C LED28.C LED44.C LED60.C LED76.C LED92.C LED108.C LED124.C R30.2 | length 1366.2
  Top Layer w20: v1(3924.81,3050) 3961.46,3050 LED124.C ; v1(3924.81,3965) 3925.2,3965.39 LED12.C ; v1(3925.95,3181.75) LED108.C ; v1(3925.95,3312.36) LED92.C ; v1(3925.95,3440.98) LED76.C ; v1(3925.95,3573.57) LED60.C ; v1(3925.95,3704.18) LED44.C ; v1(3925.95,3834.79) LED28.C
  Bottom Layer w20: v1(3924.81,3965) v1(3924.81,3050) 3924.81,2944.72 R30.2
NetLED13_C: LED13.C LED29.C LED45.C LED61.C LED77.C LED93.C LED109.C LED125.C R31.2 | length 1364.8
  Top Layer w20: v1(4038.21,3050) 4074.86,3050 LED125.C ; v1(4038.21,3965) 4038.6,3965.39 LED13.C ; v1(4039.35,3181.75) LED109.C ; v1(4039.35,3312.36) LED93.C ; v1(4039.35,3440.98) LED77.C ; v1(4039.35,3573.57) LED61.C ; v1(4039.35,3704.18) LED45.C ; v1(4039.35,3834.79) LED29.C
  Bottom Layer w20: v1(4038.21,3965) v1(4038.21,3050) 4038.21,2941.32 R31.2
NetLED14_C: LED14.C LED30.C LED46.C LED62.C LED78.C LED94.C LED110.C LED126.C R32.2 | length 1367.5
  Top Layer w20: v1(4151.6,3050) 4188.26,3050 LED126.C ; v1(4151.6,3965) 4152,3965.39 LED14.C ; v1(4152.75,3181.75) LED110.C ; v1(4152.75,3312.36) LED94.C ; v1(4152.75,3440.98) LED78.C ; v1(4152.75,3573.57) LED62.C ; v1(4152.75,3704.18) LED46.C ; v1(4152.75,3834.79) LED30.C
  Bottom Layer w20: v1(4151.6,3965) v1(4151.6,3050) 4151.6,2947.92 R32.2
NetLED15_C: LED15.C LED31.C LED47.C LED63.C LED79.C LED95.C LED111.C LED127.C R33.2 | length 1368.2
  Top Layer w20: v1(4265,3050) 4301.65,3050 LED127.C ; v1(4265,3965) 4265.39,3965.39 LED15.C ; v1(4266.14,3181.75) LED111.C ; v1(4266.14,3312.36) LED95.C ; v1(4266.14,3440.98) LED79.C ; v1(4266.14,3573.57) LED63.C ; v1(4266.14,3704.18) LED47.C ; v1(4266.14,3834.79) LED31.C
  Bottom Layer w20: v1(4265,3965) 4265,3312.36 v1(4265,3050) 4265,2949.53 R33.2
NetLED16_A: LED16.A LED17.A LED18.A LED19.A LED20.A LED21.A LED22.A LED23.A LED24.A LED25.A LED26.A LED27.A LED28.A LED29.A LED30.A LED31.A PNP8.2 | length 1806.1
  Top Layer w10: LED16.A LED17.A LED18.A LED19.A LED20.A LED21.A LED22.A LED23.A LED24.A LED25.A LED26.A LED27.A LED28.A LED29.A LED30.A LED31.A 4363.84,3893.84 v1(4375,3905)
  Bottom Layer w10: v1(4375,3905) 4375,3927.86 PNP8.2
NetLED32_A: LED32.A LED33.A LED34.A LED35.A LED36.A LED37.A LED38.A LED39.A LED40.A LED41.A LED42.A LED43.A LED44.A LED45.A LED46.A LED47.A PNP7.2 | length 1808.1
  Top Layer w10: LED32.A LED33.A LED34.A LED35.A LED36.A LED37.A LED38.A LED39.A LED40.A LED41.A LED42.A LED43.A LED44.A LED45.A LED46.A LED47.A 4311.03,3755 v1(4375,3755)
  Bottom Layer w10: v1(4375,3755) 4378.9,3758.9 PNP7.2
NetLED48_A: LED48.A LED49.A LED50.A LED51.A LED52.A LED53.A LED54.A LED55.A LED56.A LED57.A LED58.A LED59.A LED60.A LED61.A LED62.A LED63.A PNP6.2 | length 1851.5
  Top Layer w10: LED48.A LED49.A LED50.A LED51.A LED52.A LED53.A LED54.A LED55.A LED56.A LED57.A LED58.A LED59.A LED60.A LED61.A LED62.A LED63.A 4392.37,3632.63 v1(4415,3610)
  Bottom Layer w10: v1(4415,3610) 4417.28,3612.28 PNP6.2
NetLED64_A: LED64.A LED65.A LED66.A LED67.A LED68.A LED69.A LED70.A LED71.A LED72.A LED73.A LED74.A LED75.A LED76.A LED77.A LED78.A LED79.A PNP5.2 | length 1827.4
  Top Layer w10: LED64.A LED65.A LED66.A LED67.A LED68.A LED69.A LED70.A LED71.A LED72.A LED73.A LED74.A LED75.A LED76.A LED77.A LED78.A LED79.A 4334.96,3500.04 v1(4380,3455)
  Bottom Layer w10: PNP5.2 4378.74,3456.26 v1(4380,3455)
NetLED80_A: LED80.A LED81.A LED82.A LED83.A LED84.A LED85.A LED86.A LED87.A LED88.A LED89.A LED90.A LED91.A LED92.A LED93.A LED94.A LED95.A PNP4.2 | length 1824.2
  Top Layer w10: LED80.A LED81.A LED82.A LED83.A LED84.A LED85.A LED86.A LED87.A LED88.A LED89.A LED90.A LED91.A LED92.A LED93.A LED94.A LED95.A 4328.59,3371.41 v1(4380,3320)
  Bottom Layer w10: PNP4.2 4378.9,3321.1 v1(4380,3320)
NetLED96_A: LED96.A LED97.A LED98.A LED99.A LED100.A LED101.A LED102.A LED103.A LED104.A LED105.A LED106.A LED107.A LED108.A LED109.A LED110.A LED111.A PNP3.2 | length 1809.8
  Top Layer w10: LED96.A LED97.A LED98.A LED99.A LED100.A LED101.A LED102.A LED103.A LED104.A LED105.A LED106.A LED107.A LED108.A LED109.A LED110.A LED111.A 4359.2,3240.8 v1(4380,3220)
  Bottom Layer w10: PNP3.2 4378.9,3218.9 v1(4380,3220)
NetLED112_A: LED112.A LED113.A LED114.A LED115.A LED116.A LED117.A LED118.A LED119.A LED120.A LED121.A LED122.A LED123.A LED124.A LED125.A LED126.A LED127.A PNP2.2 | length 1820.5
  Top Layer w10: LED112.A LED113.A LED114.A LED115.A LED116.A LED117.A LED118.A LED119.A LED120.A LED121.A LED122.A LED123.A LED124.A LED125.A LED126.A LED127.A 4349.8,3110.2 v1(4380,3080)
  Bottom Layer w10: PNP2.2 4378.9,3078.9 v1(4380,3080)
NetPNP1_1: PNP1.1 R1.2 | length 77.1
  Bottom Layer w10: R1.2 4658.07,4003.81 PNP1.1
NetPNP2_1: PNP2.1 R5.2 | length 153.2
  Bottom Layer w8: PNP2.1 R5.2
NetPNP3_1: PNP3.1 R6.2 | length 153.2
  Bottom Layer w10: PNP3.1 R6.2
NetPNP4_1: PNP4.1 R7.2 | length 154.2
  Bottom Layer w10: PNP4.1 R7.2
NetPNP5_1: PNP5.1 R8.2 | length 156.9
  Bottom Layer w10: PNP5.1 4384.85,3416.38 R8.2
NetPNP6_1: PNP6.1 R9.2 | length 159
  Bottom Layer w10: PNP6.1 4543.69,3563.24 R9.2
NetPNP7_1: PNP7.1 R10.2 | length 154.2
  Bottom Layer w10: PNP7.1 R10.2
NetPNP8_1: PNP8.1 R11.2 | length 159.2
  Bottom Layer w10: PNP8.1 R11.2
NetPNP9_1: PNP9.1 R12.2 | length 154.2
  Bottom Layer w10: PNP9.1 R12.2
NetR2_2: R2.2 U1.4 | length 350.5
  Bottom Layer w8: U1.4 4992.79,3557.21 5065,3485 5065,3332.37 5008.94,3276.32 R2.2
NetR3_2: R3.2 U1.5 | length 331.3
  Bottom Layer w8: R3.2 4957.4,3292.4 4969.06,3304.06 5014.06,3304.06 5049,3339 5049,3456 4997.79,3507.21 U1.5
NetR4_2: R4.2 U1.6 | length 304.2
  Bottom Layer w8: R4.2 4951.15,3320.06 5007.44,3320.06 5033,3345.63 5033,3437 5012.79,3457.21 U1.6
NetR14_1: R14.1 U2.23 | length 145.6
  Bottom Layer w10: R14.1 3550,2390 3518,2422 3518,2452.54 3527.09,2461.64 U2.23
NetR15_2: R15.2 RGB1.1 | length 104
  Top Layer w20: v1(4370,2630) 4372.41,2627.59 RGB1.1
  Bottom Layer w20: R15.2 4358.3,2618.3 v1(4370,2630)
NetR16_1: R16.1 RGB1.2 | length 173.6
  Top Layer w20: v1(4370,2665) 4428.44,2665 RGB1.2
  Bottom Layer w20: R16.1 4310.83,2665 v1(4370,2665)
NetR17_1: R17.1 RGB1.4 | length 325
  Top Layer w20: v1(4245,2535) 4406.72,2535 RGB1.4
  Bottom Layer w8: v1(4245,2535) 4245.56,2535.56 4264.44,2535.56 4302.68,2573.8 R17.1
NetR18_1: R18.1 U2.5 | length 947.6
  Bottom Layer w10: R18.1 2600,2710 2771.59,2538.41 U2.5
NetR19_1: R19.1 U2.6 | length 825
  Bottom Layer w10: R19.1 2715,2705 2856,2564 U2.6
NetR20_1: R20.1 U2.7 | length 710.2
  Bottom Layer w10: R20.1 2825,2695 2930.41,2589.59 U2.7
NetR21_1: R21.1 U2.8 | length 570
  Bottom Layer w10: R21.1 2940,2720 3044.82,2615.18 U2.8
NetR22_1: R22.1 U2.9 | length 421
  Bottom Layer w10: R22.1 3055,2760 3174.23,2640.77 U2.9
NetR23_1: R23.1 U2.10 | length 300.4
  Bottom Layer w10: R23.1 3165,2760 3258.64,2666.36 U2.10
NetR24_1: R24.1 U2.11 | length 202
  Bottom Layer w10: R24.1 3285,2705 3298.05,2691.95 U2.11
NetR25_1: R25.1 U2.12 | length 157.3
  Bottom Layer w10: U2.12 3336.1,2791.57 R25.1
NetR26_1: R26.1 U2.13 | length 157.2
  Bottom Layer w10: R26.1 3558.54,2791.93 U2.13
NetR27_1: R27.1 U2.14 | length 207.3
  Bottom Layer w10: U2.14 3601.95,2691.95 3615,2705 R27.1
NetR28_1: R28.1 U2.15 | length 289.9
  Bottom Layer w10: U2.15 3621.36,2666.36 3725,2770 R28.1
NetR29_1: R29.1 U2.16 | length 420.5
  Bottom Layer w10: U2.16 3715.77,2640.77 3845,2770 R29.1
NetR30_1: R30.1 U2.17 | length 551.9
  Bottom Layer w10: U2.17 3815.18,2615.18 3960,2760 R30.1
NetR31_1: R31.1 U2.18 | length 678.4
  Bottom Layer w10: U2.18 3909.59,2589.59 4070,2750 R31.1
NetR32_1: R32.1 U2.19 | length 803.1
  Bottom Layer w10: U2.19 3994,2564 4185,2755 4185,2845.47 R32.1
NetR33_1: R33.1 U2.20 | length 922.9
  Bottom Layer w10: U2.20 4073.41,2538.41 4305,2770 R33.1
P_3.3V: C3.A C4.A C5.1 C6.1 C7.1 FPC1.14 FPC1.15 FPC1.16 PNP1.3 R4.1 RGB1.3 U1.16 U2.24 | length 4749
  Top Layer w20: v1(4375,2570) 4399.13,2594.13 RGB1.3 ; v1(4905,3190) v1(4905,3735)
  Bottom Layer w10: U2.24 3616.08,2436.05 C4.A 3625.71,2492.65 C5.1 ; U1.16 4776.6,3713.51 C7.1 4777.06,3763.62 C3.A 4890.03,3763.16 4905,3748.19 v1(4905,3735) ; v1(4905,3190) 4907.4,3192.4 R4.1
  Bottom Layer w20: 3570,4759.96 FPC1.16 4063.93,4759.96 4751.3,4072.59 PNP1.3 4750.87,4040.79 4750.87,3870.87 4735,3855 4735,3775 4746.84,3763.16 C7.1 ; C4.A 3625.71,2379.29 3715,2290 4050,2290 4295,2535 4340,2535 v1(4375,2570) 4905,3100 v1(4905,3190) ; U1.16 4770.3,3756.86 C7.1 ; C3.A@4895,3758.19 4890.03,3763.16 C6.1 C7.1
S_138A0: FPC1.5 U1.1 | length 2220.7
  Top Layer w8: v1(4280,4500) v1(4370,4500)
  Bottom Layer w8: FPC1.5 3383.66,4660.83 3544.49,4500 v1(4280,4500) ; v1(4370,4500) 5009.41,3860.59 5009.41,3733.72 U1.1
S_138A1: FPC1.4 U1.2 | length 2350.6
  Top Layer w8: v1@3485,4520 3490,4525 v1(3560,4525) ; v1(4250,4525) v1(4345,4525)
  Bottom Layer w8: FPC1.4 3363.98,4641.02 v1@3482.5,4522.5 ; v1(3560,4525) v1(4250,4525) ; v1(4345,4525) 4380,4525 4400,4505 4400,4492.63 5025.41,3867.22 5025.41,3675.41 5007.21,3657.21 U1.2
  other v1: 3485,4525
S_138A2: FPC1.3 U1.3 | length 2458.1
  Top Layer w8: v1(3415,4555) v1(3530,4555) ; v1(4225,4555) v1(4315,4555)
  Bottom Layer w8: FPC1.3 3344.29,4625.71 v1(3415,4555) ; v1(3530,4555) v1(4225,4555) ; v1(4315,4555) 4315.43,4554.57 4373.06,4554.57 4423.94,4503.69 4423.94,4491.31 5041.41,3873.84 5041.41,3825 5041.41,3636.41 5012.21,3607.21 U1.3
S_BRIGHT: FPC1.6 R1.1 | length 1775.6
  Top Layer w8: v1(3560,4580) v1(3665,4475) ; v1(4640,4135) 4715,4060 v1(4715,3975)
  Bottom Layer w8: FPC1.6 3403.35,4663.77 3487.12,4580 v1(3560,4580) ; v1(3665,4475) 4295,4475 4635,4135 v1(4640,4135) ; v1(4715,3975) 4715,3945.34 R1.1
S_CLK: FPC1.12 U2.3 | length 3156.8
  Top Layer w8: v1(3295,2490) 3330,2525 3330,2825 v1(3335.83,2830.83)
  Bottom Layer w8: v1(3295,2490) 3297.77,2487.23 U2.3 ; v1(3335.83,2830.83) 3335.83,4553.91 3143,4746.75 3143,4918.25 3211.75,4987 3445.63,4987 3517.77,4914.86 3517.77,4763.65 FPC1.12
S_LE: FPC1.11 U2.4 | length 3105.3
  Bottom Layer w8: U2.4 3354.94,2512.82 3433.23,2591.1 3433.23,4479.15 3159,4753.37 3159,4911.63 3218.37,4971 3439,4971 3501.77,4908.23 FPC1.11
S_O\E\: FPC1.10 U2.21 | length 3055.1
  Bottom Layer w8: FPC1.10 3482.09,4902.91 3430,4955 3225,4955 3175,4905 3175,4760 3450,4485 3450,4005 3449.23,4004.23 3449.23,2603.3 3533,2519.52 3551.84,2519.52 U2.21
S_RGBB: FPC1.7 R17.2 | length 2636.1
  Top Layer w8: v1(3605,4580) 3700,4485 v1(3700,4445) ; v1(3730,3005) 4160,2575 v1(4210,2575)
  Bottom Layer w8: FPC1.7 3423.03,4666.71 3484.75,4605 3575,4605 3600,4580 v1(3605,4580) ; v1(3700,4445) 3730,4415 v1(3730,3005) ; v1(4210,2575) 4248.36,2575 R17.2
S_RGBG: FPC1.8 R16.2 | length 2584.3
  Top Layer w8: v1(3560,4630) 3586.11,4630 3805,4411.11 v1(3805,4410) ; v1(3840,3005) 3830,2995 3830,2950.25 4125.25,2655 v1(4225,2655)
  Bottom Layer w8: FPC1.8 3442.72,4669.66 3482.37,4630 v1(3560,4630) ; v1(3805,4410) 3805,4005 3840,3970 v1(3840,3005) ; v1(4225,2655) 4230,2660 4246.77,2660 R16.2
S_RGBR: FPC1.9 R15.1 | length 2631.6
  Top Layer w8: v1(3530,4655) 3600,4655 v1(3805,4450) ; v1(3770,3005) 3770,2987.63 4137.63,2620 v1(4225,2620)
  Bottom Layer w8: FPC1.9 3462.4,4672.6 3480,4655 v1(3530,4655) ; v1(3770,3005) 3770,4410 3805,4445 v1(3805,4450) ; v1(4225,2620) 4226.7,2618.3 R15.1
S_SDI: FPC1.13 U2.2 | length 3266.3
  Top Layer w8: v1(3280,2460) 3273,2467 3273,2503 3314,2544 3314,2749 v1(3308,2755)
  Bottom Layer w8: v1(3280,2460) 3281.64,2461.64 U2.2 ; v1(3308,2755) 3312.75,2759.75 3312.75,2842.92 3319.83,2850 3319.83,4547.29 3127,4740.12 3127,4924.88 3205.12,5003 3452.25,5003 3541.14,4914.11 FPC1.13
S_Y\0: R12.1 U1.15 | length 437
  Bottom Layer w10: R12.1 4592.13,3911.83 4658,3845.96 4658,3741.18 4741.97,3657.21 U1.15
S_Y\1: R11.1 U1.14 | length 330.1
  Bottom Layer w10: R11.1 4608.05,3856.95 4640,3825 4640,3733.72 4766.51,3607.21 U1.14
S_Y\2: R10.1 U1.13 | length 241.5
  Bottom Layer w10: R10.1 4745.01,3557.21 U1.13
S_Y\3: R9.1 U1.12 | length 241.7
  Bottom Layer w10: R9.1 4658.77,3507.21 U1.12
S_Y\4: R8.1 U1.11 | length 195.1
  Bottom Layer w10: R8.1 4632.96,3457.21 U1.11
S_Y\5: R7.1 U1.10 | length 235.2
  Bottom Layer w10: R7.1 4729.81,3407.21 U1.10
S_Y\6: R6.1 U1.9 | length 308.8
  Bottom Layer w10: R6.1 4591.13,3178.04 U1.9
S_Y\7: R5.1 U1.7 | length 652.7
  Bottom Layer w8: R5.1 4630,3014.68 4630,3155 4882.21,3407.21 U1.7
pads on no net: FPC1. J1.1 J2.1 J3.1 J4.1 J5.1 J6.1 J7.1 J8.1 J9.1 J10.1 J11.1

## Polygon pours and split planes (outlines as drawn)
GND on Bottom Layer "Bottom Layer-No Net" (solid, remove dead copper, pour order 4): 5415,5260 1305,5260 1300,5255 1300,1950 1305,1945 5355,1945 5420,1880
GND on Top Layer "Top Layer-No Net" (solid, remove dead copper, pour order 6): 5080,5205 1355,5205 1355,2165 1345,2155 5120,2155 5240,2035 5190,2085 5190,5140

## Keep-outs
Keep-Out Layer:
  lines w6.3: 2842.9,5096.24 4065.32,5096.24 ; 2842.9,5096.43 ccw(c3452.57,3538.23) 2615.95,4987.29 2615.95,4714.83 cw(c2458.47,4714.83) 2458.47,4557.35 2125.51,4557.35 ccw(c3452.57,3538.23) 2132.03,2510.67 2556.9,2510.67 cw(c2556.9,2451.61) 2615.95,2451.61 2615.95,2258.7 4289.18,2258.7 4289.18,2451.61 cw(c4348.24,2451.61) 4348.24,2510.67 4773.1,2510.67 ccw(c3452.57,3538.23) 4779.63,4557.35 4446.66,4557.35 cw(c4446.66,4714.83) 4289.18,4714.83 4289.18,4987.29 ; 4062.91,5095.57 4063.35,5095.13 ; 4065.32,5095.64 cw(c3452.48,3538.68) 4289.36,4987.59

## Silkscreen, mask and mechanical layers (free items; w line width, h text height)
Mechanical 1:
  lines w6.3: 2218.63,3538.23 5172.36,3538.23 ; 3452.56,2551.13 3452.56,4691.12 ; 5296.71,2678.29 3452.56,3538.23 5406.78,3193.65
Mechanical 3:
  lines w6.3: 1419.33,3538.23 6104.14,3538.23 ; 3452.56,1156.66 3452.56,5565.08

## Text inside footprints (layer, text, board x,y; h text height)
U1: Mechanical 15 "1" at 4858.89,3525.74 h29.53 r270